# Altium PCB Universal_Driver v2.PcbDoc
Units mm, origin at the board's own origin, x right, y up, seen from the top; angles counter-clockwise.
Board outline 46.4 x 57.12 mm, 4 copper layers (Top Layer, Layer 2, Layer 3, Bottom Layer), stack 1.369 mm thick; 42 components, 44 nets, 192 pads, 31 vias.
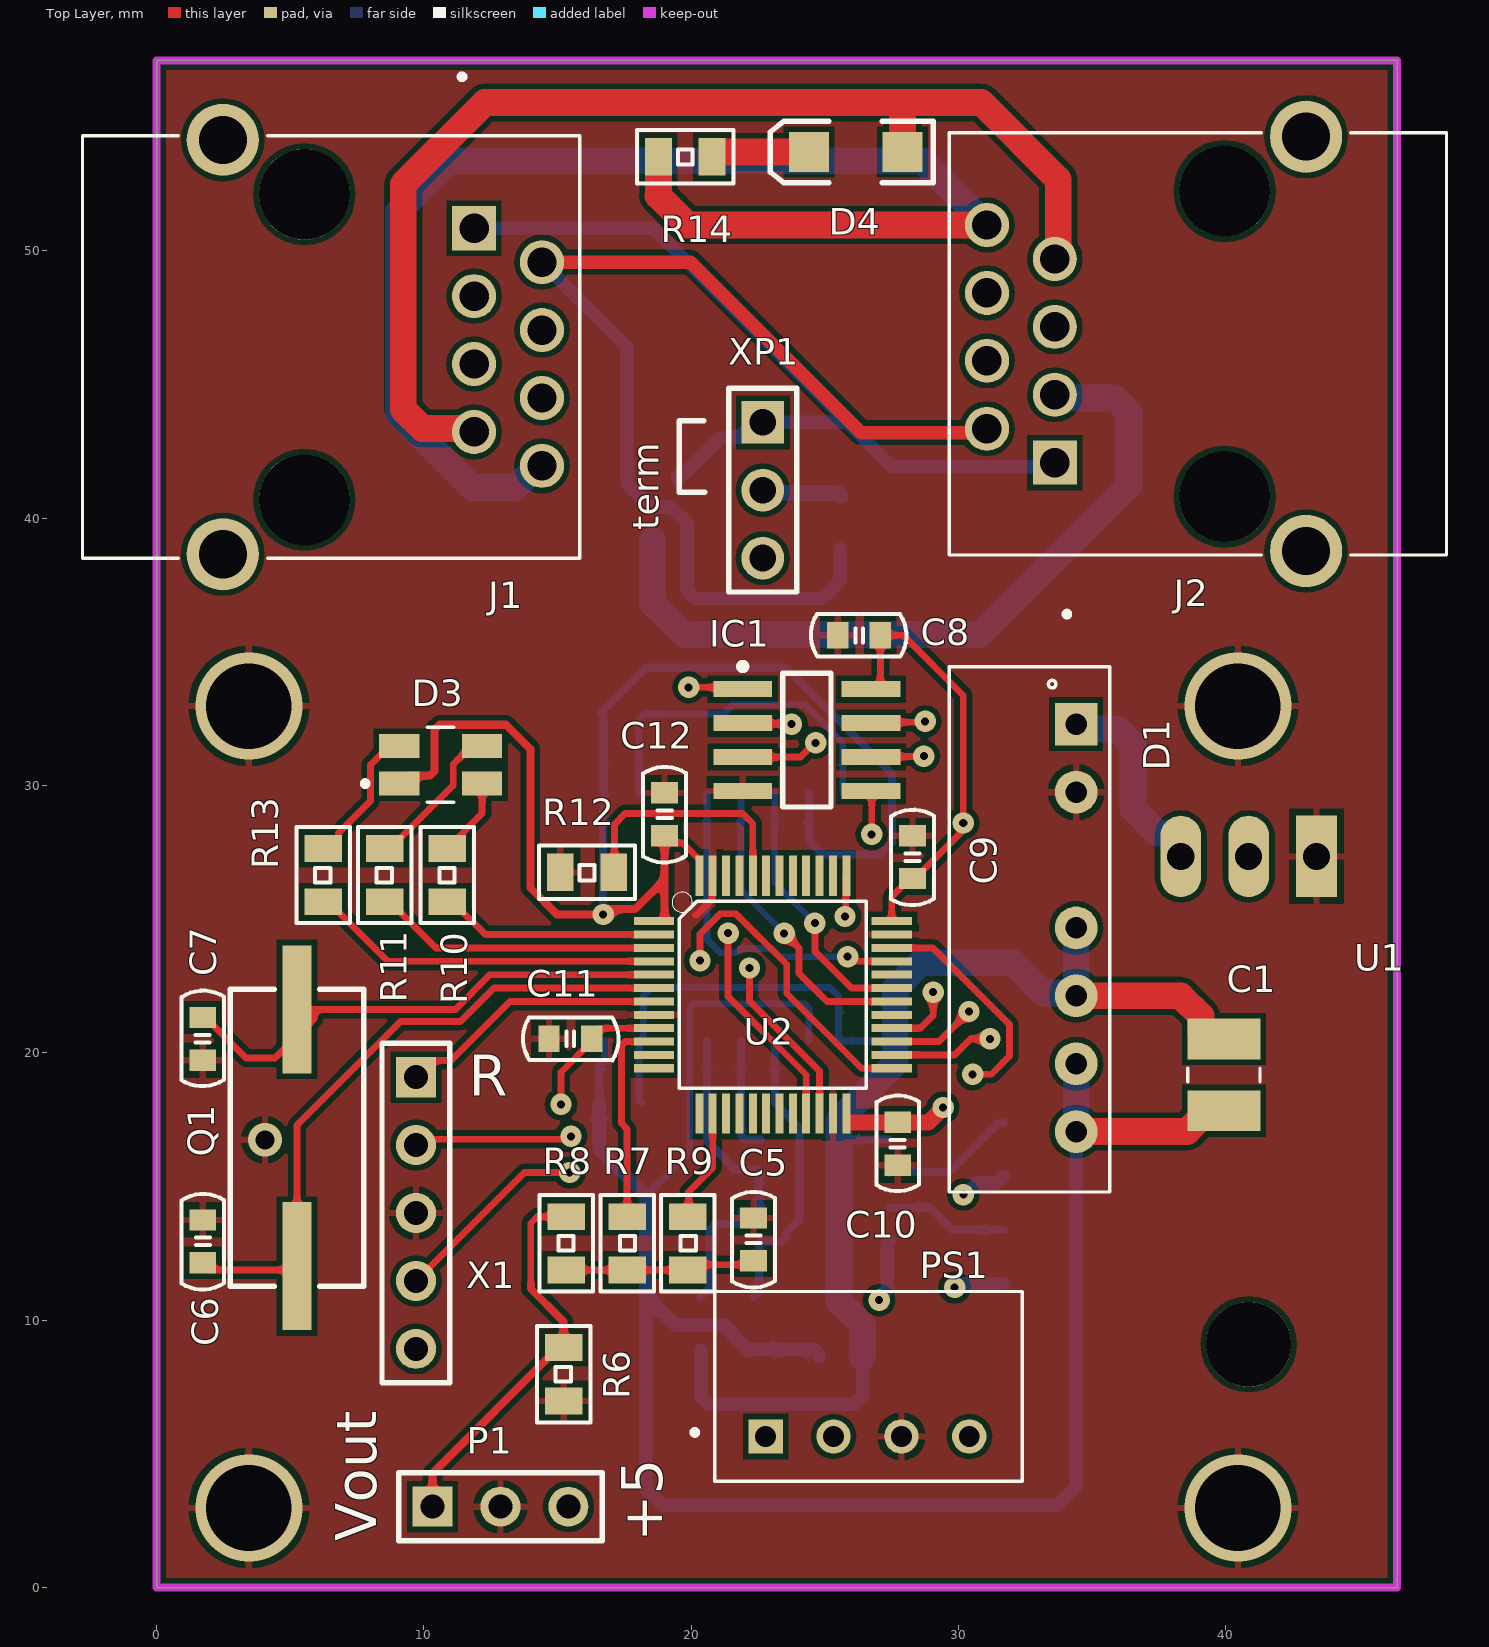
[diagram p0: Top Layer view]
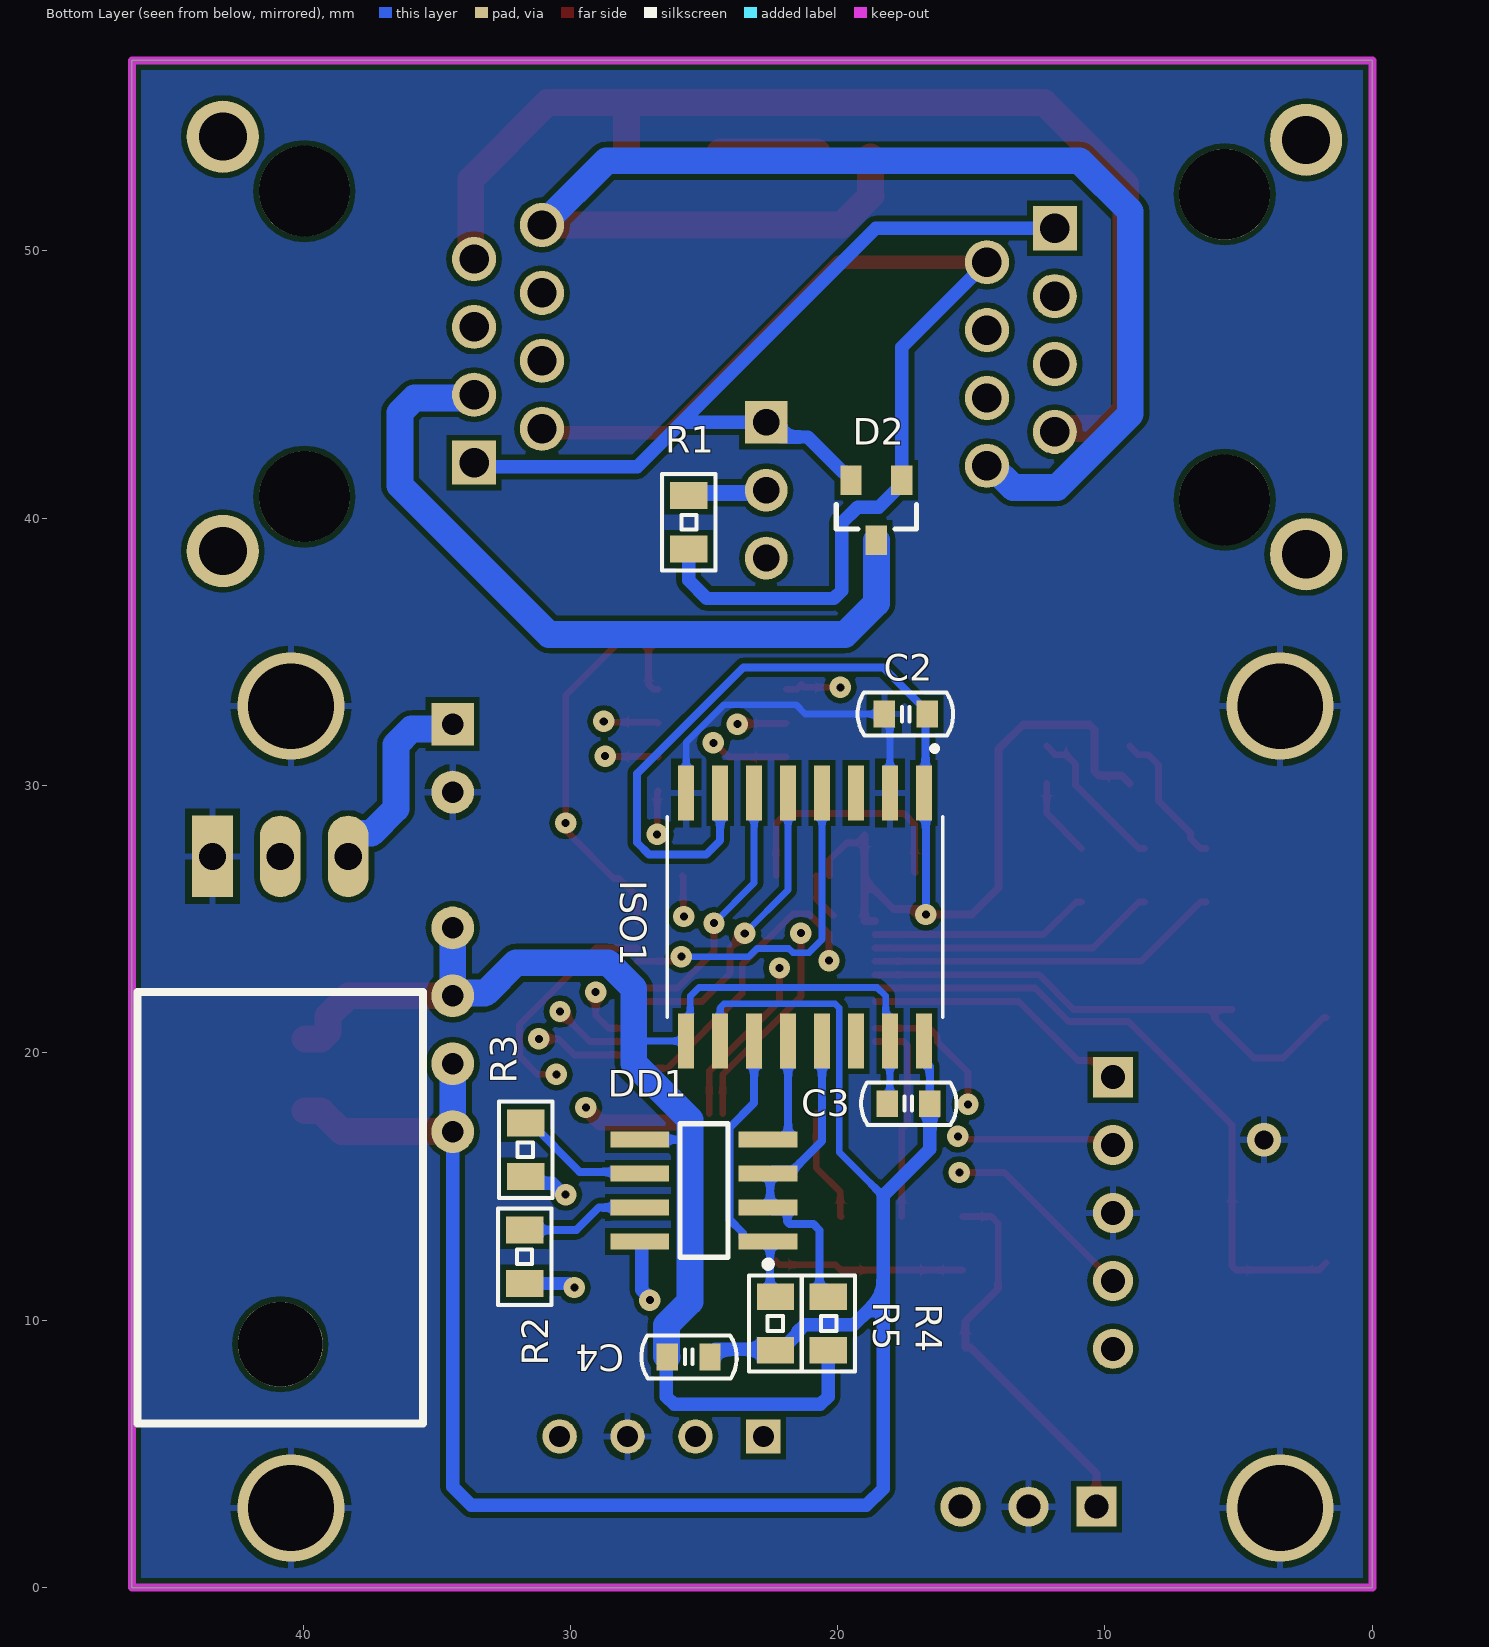
[diagram p1: Bottom Layer view, seen from below]
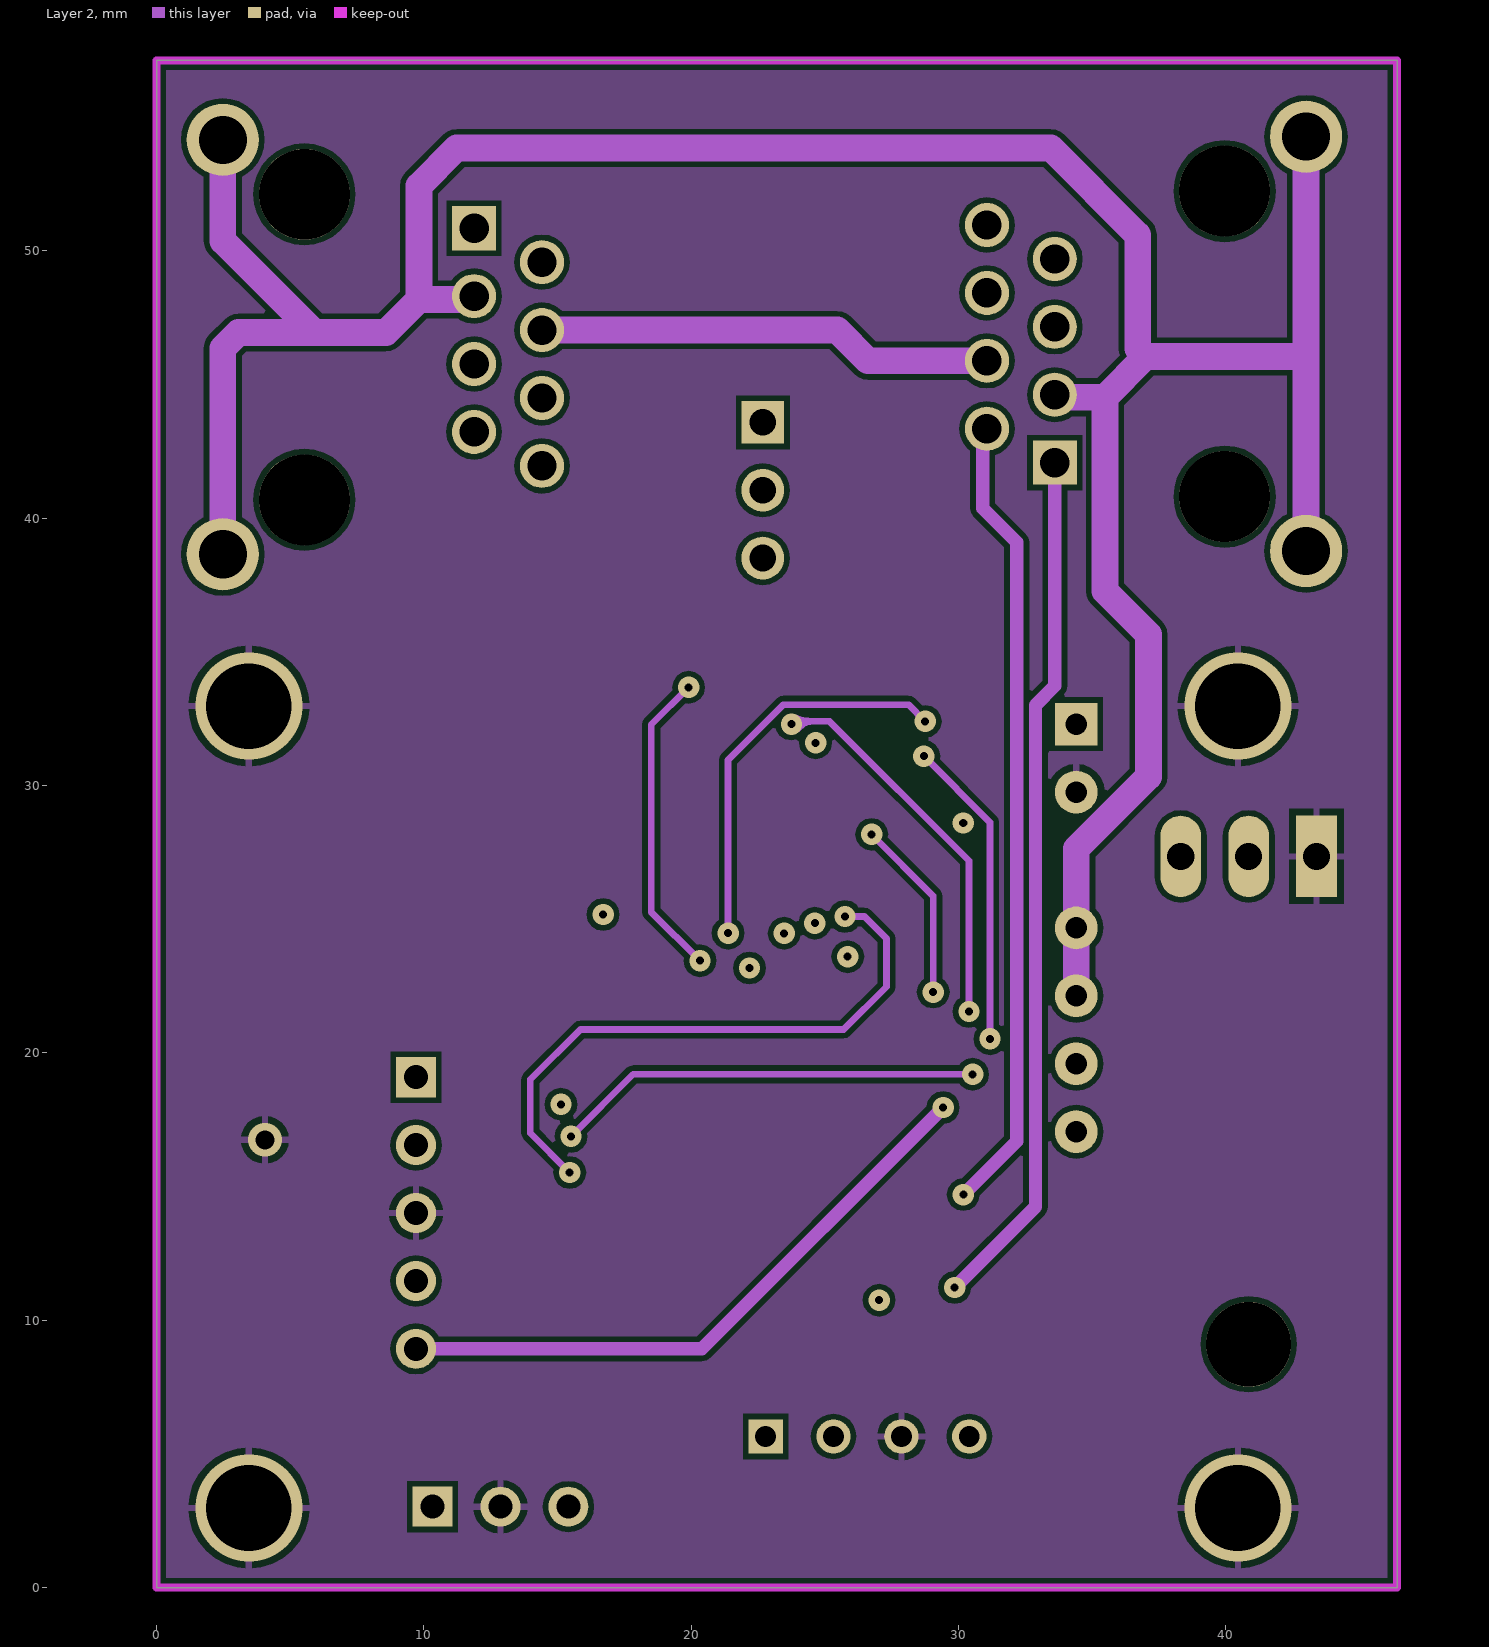
[diagram p2: Layer 2]
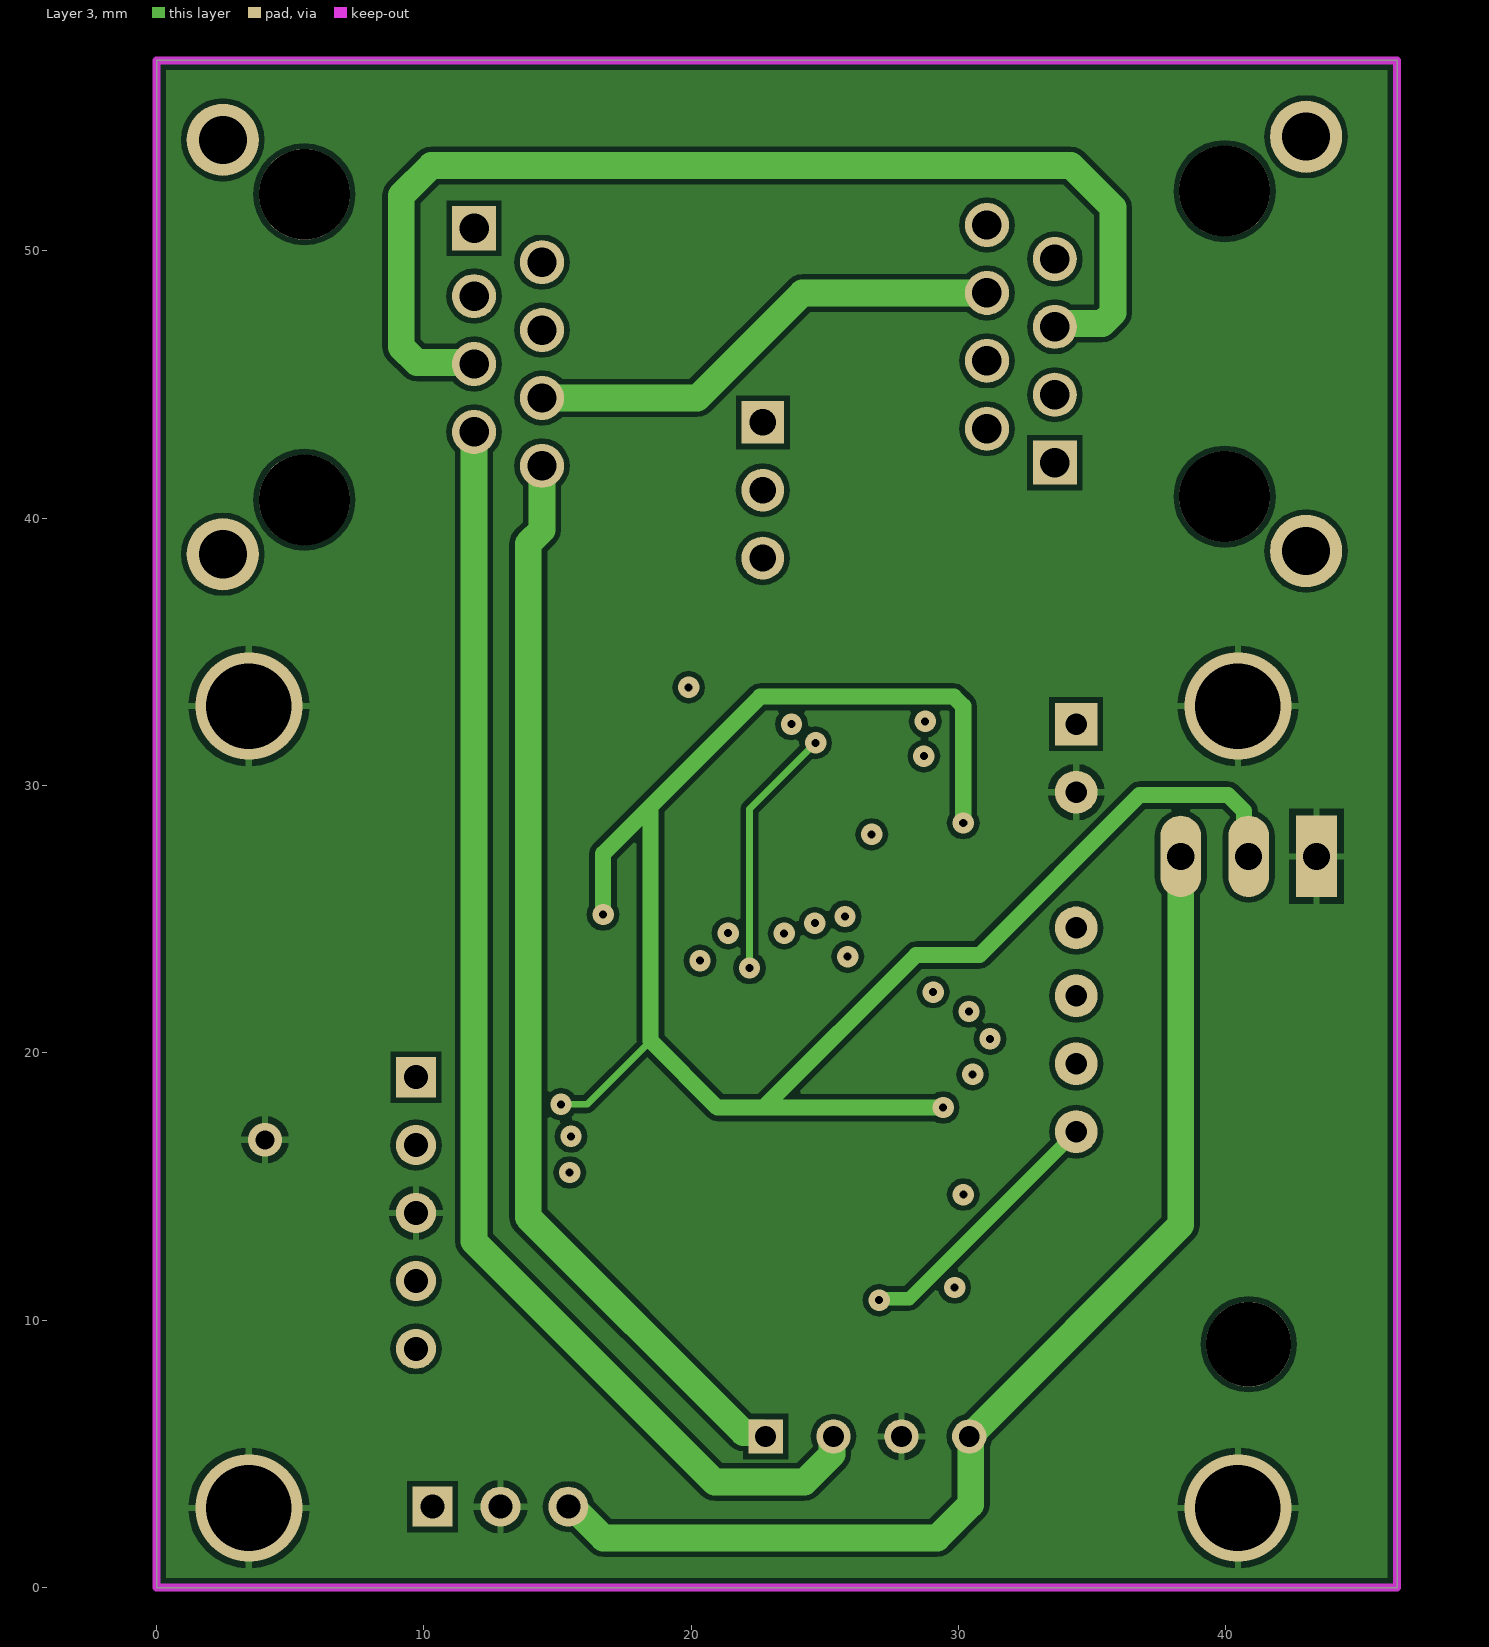
[diagram p3: Layer 3]

## Layer stack, top to bottom
Top Solder: solder mask 0.0254, SM-001, Dk 4
Top Layer: signal copper 0.035
Dielectric 1: prepreg 0.1295, PP-017, Dk 4.3
Dielectric 2: prepreg 0.1295, PP-017, Dk 4.3
Layer 2: signal copper 0.035
Dielectric 3: core 0.7112, Core-039, Dk 4.8
Layer 3: signal copper 0.035
Dielectric 4: prepreg 0.1295, PP-017, Dk 4.3
Dielectric 5: prepreg 0.1295, PP-017, Dk 4.3
Bottom Layer: signal copper 0.035
Bottom Solder: solder mask 0.0254, SM-001, Dk 4

## Board outline
0,0 0,57.125 46.4,57.125 46.4,0

## Design rules (kind name [scope] priority, off if disabled: settings)
Clearance Clearance_1 [InNetClass('ISO') vs InNet('GND')] p1: gap=1 ignorepadtopadclearanceinfootprint=FALSE
Clearance [All] p2: gap=0.2 ignorepadtopadclearanceinfootprint=FALSE
ComponentClearance [All] p1: gap=0.01 collisioncheckmode=3 verticalgap=0.01 showdistances=FALSE
DiffPairsRouting [All] p1: maxlimit=0.254 minlimit=0.2 mostfreqgap=0.254 toplayer_minwidth=0.25 toplayer_maxwidth=0.381 toplayer_prefwidth=0.381 midlayer1_minwidth=0.25 midlayer1_maxwidth=0.381 midlayer1_prefwidth=0.381 midlayer2_minwidth=0.25 midlayer2_maxwidth=0.381 midlayer2_prefwidth=0.381 bottomlayer_minwidth=0.25 bottomlayer_maxwidth=0.381 bottomlayer_prefwidth=0.381 maxuncoupledlength=12.7
HoleSize [All] p1: absolutevalues=TRUE maxlimit=5 minlimit=0.025 maxpercent=80.000 minpercent=20.000
MinimumSolderMaskSliver [All] p1: minsoldermaskwidth=0
PolygonConnect [All] p1: connectstyle=Relief reliefconductorwidth=0.254 reliefentries=4 polygonreliefangle="90 Angle" airgapwidth=0.254
RoutingVias [All] p1: holewidth=0.3 width=1 viastyle="Through Hole" minholewidth=0.3 minwidth=0 maxholewidth=1 maxwidth=4
SilkToSolderMaskClearance [IsPad] p1: minsilkscreentomaskgap=0.1 clearancetoexposedcopper=TRUE
SolderMaskExpansion [All] p1: expansion=0.102 istentingtop=FALSE
UnRoutedNet [All] p1: checkbadconnections=TRUE
Width [All] p1: maxlimit=4 minlimit=0.254 preferedwidth=0.254
24 further rules are at their usual default settings.

## Components (designator, comment, footprint, x,y, rotation, side; value= is the part's Value field where it differs from the comment)
C1 "10uF" CAPC3225X270N 39.925,19.175 r270 top
C2 "0.1uF" "CAPACITOR 0603" 16.65,32.675 r0 bottom
C3 "0.1uF" "CAPACITOR 0603" 18.15,18.1 r180 bottom
C4 "0.1uF" "CAPACITOR 0603" 26.375,8.625 r180 bottom
C5 "0.1uF" "CAPACITOR 0603" 22.325,13.825 r270 top
C6 "20pF" "CAPACITOR 0603" 1.725,13.75 r270 top
C7 "20pF" "CAPACITOR 0603" 1.725,19.725 r90 top
C8 "0.1uF" "CAPACITOR 0603" 27.075,35.625 r180 top
C9 "0.1uF" "CAPACITOR 0603" 28.275,28.125 r270 top
C10 "0.1uF" "CAPACITOR 0603" 27.725,15.8 r90 top
C11 "0.1uF" "CAPACITOR 0603" 14.675,20.525 r0 top
C12 "0.1uF" "CAPACITOR 0603" 19,29.725 r270 top
D1 "AM1DS-0505SJZ" AM2D-NZ 34.4,32.295 r270 top
D2 "SM712" SOT23 18.55,40.3 r270 bottom
D3 "150141M173100" LED_150141M173100 10.625,30.775 r180 top
D4 "LED2" 3.2X1.6X1.1 26.15,53.7 r180 top
DD1 "MAX485" NSO8 25,14.85 r0 bottom
IC1 "GD25Q16CTIGR" NSO8 24.325,31.7 r0 top
ISO1 "D?" *SOIC127P1030X265-16N 21.22,25.085 r270 bottom
J1 "A-2004-2-4-LPS-N-R" ASSMANN_A-2004-2-4-LPS-N-R 5.525,46.405 r270 top
J2 "A-2004-2-4-LPS-N-R" ASSMANN_A-2004-2-4-LPS-N-R 39.95,46.525 r90 top
P1 "Header 3" HDR1X3 10.32,3.025 r0 top
PS1 "TME_2405S" CONV_TME_2405S 26.63,7.525 r0 top
Q1 "12MHz" HC49SM 5.25,16.825 r90 top
R1 "120" "Resistor 0805" 25.575,40.85 r270 bottom
R2 "10" "Resistor 0805" 31.7,11.375 r90 bottom
R3 "10" "Resistor 0805" 31.675,15.375 r90 bottom
R4 "10K" "Resistor 0805" 20.35,10.875 r270 bottom
R5 "10K" "Resistor 0805" 22.325,8.875 r90 bottom
R6 "10K" "Resistor 0805" 15.225,6.975 r90 top
R7 "10" "Resistor 0805" 17.6,13.875 r270 top
R8 "10K" "Resistor 0805" 15.325,11.875 r90 top
R9 "10" "Resistor 0805" 19.875,13.875 r270 top
R10 "3.9k" "Resistor 0805" 10.875,25.65 r90 top
R11 "3.9k" "Resistor 0805" 8.525,25.65 r90 top
R12 "510" "Resistor 0805" 17.1,26.75 r180 top
R13 "3.9k" "Resistor 0805" 6.225,25.65 r90 top
R14 "10K" "Resistor 0805" 20.775,53.525 r180 top
U1 "LM1117T-3.3" TO-220-KCS0003B 40.85,27.35 r180 top
U2 "STM32F303CBT7" LQFP48 23.05,22.175 r0 top
X1 "PLS-5" PLS-5-3D 9.7,19.09 r270 top
XP1 "PLS-3" ZL201-3 22.675,41.05 r270 top

## Footprints (in the part's own frame and the unit in brackets; to place one, negate y for a bottom-side part, rotate by r counter-clockwise, add the part's x,y. Pads: shape width x height; smd on the part's side, far side on the other; paste and mask are expansions set on the pad)
3.2X1.6X1.1 [mm] "SMT LED; 2 Flat Leads"
  rect 1.5x1.5 smd: 1(-1.75,0) 2(1.75,0)
  silkscreen extent -2.9,-1.15 3.2,1.15
*SOIC127P1030X265-16N [mm]
  rect 2.06x0.6 smd: 1(-4.64,4.445) 2(-4.64,3.175) 3(-4.64,1.905) 4(-4.64,0.635) 5(-4.64,-0.635) 6(-4.64,-1.905) 7(-4.64,-3.175) 8(-4.64,-4.445) 9(4.64,-4.445) 10(4.64,-3.175) 11(4.64,-1.905) 12(4.64,-0.635) 13(4.64,0.635) 14(4.64,1.905) 15(4.64,3.175) 16(4.64,4.445)
  silkscreen extent -6.4,-5.15 3.75,5.15
AM2D-NZ [mm]
  rect 1.6x1.6 hole 0.8: 1(0,0)
  round 1.6 hole 0.8: 2(2.54,0) 4(7.62,0) 5(10.16,0) 6(12.7,0) 7(15.24,0)
  silkscreen extent -2.15,-4.75 17.5,1.25
ASSMANN_A-2004-2-4-LPS-N-R [mm]
  rect 1.65x1.65 hole 1.1: 1(-4.445,6.35)
  round 1.65 hole 1.1: 2(-3.175,8.89) 3(-1.905,6.35) 4(-0.635,8.89) 5(0.635,6.35) 6(1.905,8.89) 7(3.175,6.35) 8(4.445,8.89)
  round 2.7 hole 1.8: S1(-7.75,-3.05) S2(7.75,-3.05)
  round 3.4 hole 3.4 unplated: ""(-5.715,0) ""(5.715,0)
  silkscreen extent -10.21,-8.3 7.9,10.3
"CAPACITOR 0603" [mm]
  rect 0.8x1 smd: 1(0,0) 2(1.6,0)
  silkscreen extent -0.97,-0.8 2.6,0.8, body extent -0.01,-0.38 1.64,0.42, height 0.81
CAPC3225X270N [mm]
  rect 1.53x2.72 smd: 1(-1.341,0) 2(1.341,0)
  silkscreen extent -0.26,-1.35 0.26,1.35
CONV_TME_2405S [mm]
  rect 1.288x1.288 hole 0.78: 1(-3.85,-1.875)
  round 1.288 hole 0.78: 2(-1.31,-1.875) 3(1.23,-1.875) 4(3.77,-1.875)
  silkscreen extent -6.6,-3.55 5.75,3.55, body extent -5.83,-3.51 5.57,2.49, height 10
HC49SM [mm] "Quartz crystal resonator"
  rect 4.8x1.1 smd mask+0.06: 1(-4.8,0) 2(4.8,0)
  silkscreen extent -5.55,-2.5 5.55,2.5, body extent -6.7,-2.45 6.7,2.45, height 5.09
HDR1X3 [mm] "Connector; Header; 3 Position"
  rect 1.5x1.5 hole 0.9: 1(0,0)
  round 1.5 hole 0.9: 2(2.54,0) 3(5.08,0)
  silkscreen extent -1.27,-1.27 6.35,1.27
LED_150141M173100 [mm]
  rect 1.5x0.9 smd: 1(1.55,0.7) 2(1.55,-0.7) 3(-1.55,0.7) 4(-1.55,-0.7)
  silkscreen extent -0.5,-1.4 2.92,1.4
LQFP48 [mm]
  rect 1.5x0.3 smd: 1(-4.45,2.75) 2(-4.45,2.25) 3(-4.45,1.75) 4(-4.45,1.25) 5(-4.45,0.75) 6(-4.45,0.25) 7(-4.45,-0.25) 8(-4.45,-0.75) 9(-4.45,-1.25) 10(-4.45,-1.75) 11(-4.45,-2.25) 12(-4.45,-2.75) 25(4.45,-2.75) 26(4.45,-2.25) 27(4.45,-1.75) 28(4.45,-1.25) 29(4.45,-0.75) 30(4.45,-0.25) 31(4.45,0.25) 32(4.45,0.75) 33(4.45,1.25) 34(4.45,1.75) 35(4.45,2.25) 36(4.45,2.75)
  rect 0.3x1.5 smd: 13(-2.75,-4.45) 14(-2.25,-4.45) 15(-1.75,-4.45) 16(-1.25,-4.45) 17(-0.75,-4.45) 18(-0.25,-4.45) 19(0.25,-4.45) 20(0.75,-4.45) 21(1.25,-4.45) 22(1.75,-4.45) 23(2.25,-4.45) 24(2.75,-4.45) 37(2.75,4.45) 38(2.25,4.45) 39(1.75,4.45) 40(1.25,4.45) 41(0.75,4.45) 42(0.25,4.45) 43(-0.25,4.45) 44(-0.75,4.45) 45(-1.25,4.45) 46(-1.75,4.45) 47(-2.25,4.45) 48(-2.75,4.45)
  silkscreen extent -3.77,-3.5 3.5,3.84
NSO8 [mm] "SOIC, 8-Leads, Body 4.9x3.9mm, Pitch 1.27mm"
  rect 2.2x0.6 smd mask+0.06: 1(-2.4,1.905) 2(-2.4,0.635) 3(-2.4,-0.635) 4(-2.4,-1.905) 5(2.4,-1.905) 6(2.4,-0.635) 7(2.4,0.635) 8(2.4,1.905)
  silkscreen extent -2.52,-2.5 0.9,2.88, body extent -3,-2.45 3,2.45, height 1.7
PLS-5-3D [mm] "Connector; Header; 5 Position"
  rect 1.5x1.5 hole 0.9: 1(0,0)
  round 1.5 hole 0.9: 2(2.54,0) 3(5.08,0) 4(7.62,0) 5(10.16,0)
  silkscreen extent -1.27,-1.27 11.43,1.27, body extent -1.27,-1.27 11.43,1.27, height 8.44
"Resistor 0805" [mm]
  rect 1x1.4 smd: 1(0,0) 2(2,0)
  silkscreen extent -0.8,-1 2.8,1, body extent -0.03,-0.65 2.02,0.65, height 0.41
SOT23 [mm] "SOT23, 3-Leads, Body 2.9x1.3mm, Pitch 0.95mm"
  rect 1.1x0.8 smd mask+0.06: 1(-1.125,0.95) 2(-1.125,-0.95) 3(1.125,0)
  silkscreen extent -0.2,-1.5 0.7,1.5, body extent -1.32,-1.5 1.32,1.5, height 1.08
TO-220-KCS0003B [mil]
  rect 60x120 hole 40: 1(-100,0)
  oval 60x120 hole 40: 2(0,0) 3(100,0)
  round 125 hole 125 unplated: ""(0,718.5)
  body extent -190,-97 200,827
ZL201-3 [mm] "Connector; PLS-3; pitch 2.54"
  rect 1.6x1.6 hole 1 mask+0.06: 1(-2.54,0)
  round 1.6 hole 1 mask+0.06: 2(0,0) 3(2.54,0)
  silkscreen extent -3.81,-1.27 3.81,1.27, body extent -3.81,-1.27 3.81,1.27, height 8.44

## Part data
C1 C2 C3 C4 C5 C6 C7 C8 C9 C10 C11 C12: library part Capasitor
D2: "Asymmetrical TVS Diode for Extended Common-Mode RS-485"
D3: "Red, Green, Blue _RGB_ 625nm Red, 520nm Green, 470nm Blue LED Indication - Discrete 2V Red, 3.2V Green, 3.2V Blue 1411 _3528 Metric_", Package="1411 WÃ¼rth Elektronik", Availability=Unavailable, MF="Wurth Electronics", MP=150141M173100, Price=None, SnapEDA_Link=https://www.snapeda.com/parts/150141M173100/Wurth%20Electronics%20Inc./view-part/281733/?ref=snap
D4: "Typical RED, GREEN, YELLOW, AMBER GaAs LED", LatestRevisionDate=17-Jul-2002, LatestRevisionNote="Re-released for DXP Platform.", PackageDescription="SM LED; 2 Flat Leads", PackageReference=3.2X1.6X1.1, PackageVersion=Feb-2002, Published=8-Jun-2000, Publisher="Altium Limited"
DD1: "Low-Power, Slew-Rate-Limited RS-485/RS-422 Transceiver", ComponentLink1URL=http://pdfserv.maxim-ic.com/en/ds/MAX1487-MAX491.pdf, Type=MAX485
IC1: library part W25Q128FVEIG, "128M-bit Serial Flash Memory with uniform 4KB sectors and Dual/Quad SPI and QPI"
ISO1: library part ISO7341
J1 J2: "Jack Modular Connector 8p8c _RJ45, Ethernet_ 90Â° Angle _Right_ Shielded", Package=None, Availability=Unavailable, MF="Assmann WSW", MP=A-2004-2-4-LPS-N-R, Price=None, SnapEDA_Link=https://www.snapeda.com/parts/A-2004-2-4-LPS-N-R/Assmann%20WSW%20Components/view-part/454861/?ref=snap
P1: "Header, 3-Pin", LatestRevisionDate=17-Jul-2002, LatestRevisionNote="Re-released for DXP Platform.", Publisher="Altium Limited"
PS1: "1 Watt DC/DC converter, industrial, 10% input, unregulated, encapsulated, SIP-4 package", Package="SIP-4 Traco Power", Availability="In Stock", Check_prices=https://www.snapeda.com/parts/TME%202405S/Traco%20Power/view-part/488335/?ref=eda, MF="Traco Power", MP="TME 2405S", Price=None, SnapEDA_Link=https://www.snapeda.com/parts/TME%202405S/Traco%20Power/view-part/488335/?ref=snap
Q1: library part "Quartz Crystal", "Quartz Crystal"
R1 R2 R3 R4 R5 R6 R7 R8 R9 R10 R11 R12 R13 R14: library part Resistor
U1: "Linear Voltage Regulator IC 1 Output 800mA TO-220-3", Package="TO-220 Texas Instruments", Availability=Unavailable, MF="Texas Instruments", MP=LM1117T-3.3, Price=None, SnapEDA_Link=https://www.snapeda.com/parts/LM1117T-3.3/Texas%20Instruments/view-part/103788/?ref=snap
U2: "ARMÂ® CortexÂ®-M4 STM32F3 Microcontroller IC 32-Bit 72MHz 128KB _128K x 8_ FLASH 48-LQFP _7x7_", Package="LQFP-48 STMicroelectronics", Availability=Unavailable, MF=STMicroelectronics, MP=STM32F303CBT7, Price=None, SnapEDA_Link=https://www.snapeda.com/parts/STM32F303CBT7/STMicroelectronics/view-part/560080/?ref=snap
X1: "Header, 5-Pin", LatestRevisionDate=17-Jul-2002, LatestRevisionNote="Re-released for DXP Platform.", Publisher="Altium Limited"
XP1: library part "Select jump", "Connector, 3-Pin", Class="Электронные компоненты", Installation=DIP, Ordering_Information={Ordering_Information}, Pins=3, Pitch_mm={Pitch_mm}, SubClass=Разъемы, Type_of_connector={Type_of_connector}

## Via types
v1: diameter 0.8, hole 0.3, Top Layer to Bottom Layer, tented both sides, 26 vias
v2: diameter 4, hole 3.2, Top Layer to Bottom Layer, 4 vias
v3: diameter 1.27, hole 0.711, Top Layer to Bottom Layer, tented both sides, 1 vias

## Nets (pads, with @x,y where several pads share a name; then routed paths per layer and width w, separated by ;. In a path a pad name is that pad's centre, name@x,y a point inside that pad or via, vN(x,y) a via of type N, cw(c..) or ccw(c..) an arc to the next point about the centre after c; other vN are vias at no path point)
485_A: D2.1 J1.2 J2.2 R1.2 R3.1 | length 73.5
  Top Layer w0.5: J1.2 19.97,49.58 26.35,43.2 30.91,43.2 J2.2
  Layer 2 w0.5: v1(30.175,14.7) 32.175,16.7 32.175,39.1 30.9,40.375 30.9,43.19 J2.2
  Bottom Layer w0.5: J1.2 17.6,46.395 D2.1 17.6,41.275 18.457,40.418 19.257,40.418 19.85,39.825 19.85,37.293 20.143,37 24.9,37 25.575,37.675 R1.2 ; v1(30.175,14.7) 30.256,14.7 30.681,15.125 31.425,15.125 R3.1
485_B: D2.2 J1.1 J2.1 R2.1 XP1.1 | length 67.1
  Layer 2 w0.5: v1(29.85,11.225) 32.875,14.25 32.875,33.006 33.6,33.731 J2.1
  Bottom Layer w0.5: J1.1 13.694,50.85 13.699,50.855 18.57,50.855 25.835,43.59 ; D2.2 19.5,41.575 19.65,41.725 19.8,41.725 21.115,43.04 22.125,43.04 XP1.1 25.835,43.59 ; v1(29.85,11.225) 29.931,11.225 30.081,11.375 R2.1 ; J2.1 33.445,41.925 27.5,41.925 25.835,43.59
+3.3v: C2.1 C8.1 C9.2 C10.2 C11.2 C12.2 D3.1 IC1.8 ISO1.1 ISO1.7 U1.2 U2.1 U2.9 U2.24 U2.36 U2.48 X1.5 | length 174
  Top Layer w0.254: v1(15.125,18.075) 15.125,19.275 16.275,20.425 C11.2 ; C11.2@16.275,20.625 16.575,20.925 U2.9 ; C12.2 19.273,27.852 19.673,27.852 20.3,27.225 U2.48 ; IC1.8 26.902,33.605 27.075,33.778 C8.1 27.925,35.625 30.173,33.377 v1(30.173,28.598) 30.069,28.494 30.069,28.219 28.375,26.525 C9.2 28.175,26.525 27.5,25.85 U2.36
  Top Layer w0.3: D3.1 9.375,30.375 10.224,30.375 10.4,30.551 10.4,32.099 10.576,32.275 13.07,32.275 13.977,31.368 13.977,26.178 14.98,25.175 16.835,25.175 17.035,25.375 17.9,25.375 19,26.475 ; U2.1 19,24.925 19,26.475 ; C12.2 19,26.475
  Top Layer w0.6: 25.95,17.4 C10.2 28.875,17.4 29.42,17.945 v1(29.42,17.955)
  Layer 2 w0.5: X1.5 20.394,8.93 v1(29.42,17.955)
  Layer 3 w0.254: v1(15.125,18.075) 16.1,18.075 18.475,20.45
  Layer 3 w0.6: v1(16.7,25.175) 16.7,27.45 18.475,29.225 ; v1(29.42,17.955) 29.414,17.95 22.7,17.95 ; v1(30.173,28.598) 30.173,32.974 29.822,33.325 22.575,33.325 18.475,29.225 ; U1.2 40.673,27.527 40.673,29.052 40.075,29.65 36.775,29.65 30.787,23.662 28.412,23.662 22.7,17.95 ; 18.475,29.225 18.475,20.45 20.975,17.95 22.7,17.95
  Bottom Layer w0.3: v1(16.7,25.175) 16.7,29.1 16.775,29.175 ISO1.1 16.713,29.787 16.713,32.613 C2.1 16.65,32.775 18.3,34.425 23.528,34.425 27.5,30.453 27.5,27.864 27.061,27.425 24.918,27.425 24.395,27.948 ISO1.7
+5v: D1.1 P1.3 PS1.4 U1.3 | length 51.3
  Layer 3 w1: P1.3 15.535,3.025 16.71,1.85 29.2,1.85 30.45,3.1 30.45,5.6 PS1.4 38.31,13.56 U1.3
  Bottom Layer w1: D1.1 34.582,32.113 35.939,32.113 36.525,31.527 36.525,29.135 37.448,28.212 38.068,28.212 38.31,27.97 U1.3
+5v_ISO: C1.2 C3.2 C4.2 D1.6 D1.7 DD1.8 ISO1.10 ISO1.16 R5.1 | length 89.3
  Top Layer w1: D1.7 38.551,17.055 39.33,17.834 C1.2
  Layer 3 w0.5: v1(27.025,10.75) 27.082,10.807 28.152,10.807 D1.7
  Bottom Layer w0.254: 18.3,14.65 19.942,16.292 19.942,21.689 20.091,21.838 24.246,21.838 24.395,21.689 ISO1.10
  Bottom Layer w0.3: C3.2 16.55,19.49 16.775,19.715 ISO1.16
  Bottom Layer w0.5: C3.2 16.55,16.4 18.3,14.65 18.3,10.925 ; C4.2 24.775,8.725 24.588,8.913 22.363,8.913 R5.1 22.125,8.875 21.521,9.479 21.521,9.54 21.236,9.825 19.4,9.825 18.3,10.925 ; v1(27.025,10.75) 27.025,10.831 27.325,11.131 27.325,12.895 27.35,12.895 DD1.8 ; D1.7 34.4,3.775 33.7,3.075 18.925,3.075 18.3,3.7 18.3,10.925
  Bottom Layer w1: D1.7 D1.6
+5v_RJ: J1.4 J2.4 | length 17.1
  Layer 2 w1: J1.4 25.46,47.04 26.61,45.89 J2.4
+24: D4.1 J1.7 J2.7 PS1.2 | length 91.8
  Top Layer w1: J1.7 11.751,43.354 9.946,43.354 9.225,44.075 9.225,52.5 12.275,55.55 27.875,55.55 ; D4.1 27.9,55.525 27.875,55.55 ; J2.7 33.724,49.824 33.724,52.676 30.85,55.55 27.875,55.55
  Layer 3 w1: J1.7 11.875,12.95 20.875,3.95 24.234,3.95 25.265,4.981 25.265,5.595 PS1.2
AGND: C2.2 C5.1 C6.1 C7.1 C8.2 C9.1 C10.1 C11.1 C12.1 D1.2 IC1.4 ISO1.2 ISO1.8 P1.2 PS1.3 R6.1 R12.2 U1.1 U2.8 U2.23 U2.35 U2.47 X1.3 | length 14.8
  Top Layer w0.254: 20.15,25.15 20.187,25.15 20.777,25.74 20.777,26.602 U2.47
  Bottom Layer w0.254: ISO1.2 18.045,32.47 C2.2 21.211,32.675 21.563,33.027 24.251,33.027 25.665,31.613 ISO1.8
  other v2: 3.45,2.975 40.45,2.975 3.45,32.975 40.45,32.975
  other v3: 4.05,16.75
B: R13.1 U2.4 | length 13.3
  Top Layer w0.254: R13.1 6.425,25.65 8.65,23.425 U2.4
DE: ISO1.4 U2.33 | length 12.9
  Top Layer w0.254: v1(25.85,23.6) 25.998,23.6 26.173,23.425 U2.33
  Bottom Layer w0.254: ISO1.4 20.585,24.239 21.075,23.749 21.677,23.749 21.832,23.904 23.018,23.904 23.322,23.6 v1(25.85,23.6)
G: R11.1 U2.3 | length 10.8
  Top Layer w0.254: R11.1 8.725,25.65 9.098,25.277 10.45,23.925 U2.3
GND_24: J1.8 J2.8 PS1.1 R14.2 | length 93
  Top Layer w1: R14.2 18.775,52.1 18.75,52.075 19.855,50.97 J2.8
  Layer 3 w1: J1.8 14.415,39.565 13.9,39.05 13.9,13.85 21.956,5.794 22.636,5.794 PS1.1
  Bottom Layer w1: J1.8 14.239,41.96 13.431,41.152 11.796,41.152 9.05,43.898 9.05,51.475 10.95,53.375 28.655,53.375 J2.8
GND_ISO: C1.1 C3.1 C4.1 D1.4 D1.5 D2.3 DD1.5 ISO1.9 ISO1.15 J1.3 J1.S1 J1.S2 J2.3 J2.S1 J2.S2 R4.2 | length 203
  Top Layer w1: D1.5 38.306,22.135 39.065,21.376 39.065,20.781 39.33,20.516 C1.1
  Layer 2 w1: J1.S2 2.475,46.364 3.061,46.95 5.9,46.95 ; J1.S1 2.475,50.375 5.9,46.95 ; J1.3 11.751,48.186 9.811,48.186 ; J2.3 33.695,44.525 35.475,44.525 ; D1.5 34.4,27.634 37.1,30.334 37.1,35.65 35.475,37.275 35.475,44.525 ; J2.S1 43,46.05 ; J2.S2 43,46.05 ; 5.9,46.95 8.575,46.95 9.811,48.186 ; 9.811,48.186 9.811,52.436 11.225,53.85 33.45,53.85 36.7,50.6 36.7,46.35 37,46.05 ; 35.475,44.525 37,46.05 ; 37,46.05 43,46.05
  Bottom Layer w0.254: C3.1 18.045,18.205 ISO1.15 18.2,20.6 18.2,22.126 18.52,22.447 25.19,22.447 25.51,22.126 25.51,20.6 ISO1.9 27.555,20.445 27.625,20.375
  Bottom Layer w0.3: 25.525,16.7 25.58,16.755 DD1.5 ; 33.161,21.886 34.151,21.886 D1.5
  Bottom Layer w0.5: R4.2 20.357,8.868 20.357,7.143 20.65,6.85 26.117,6.85 26.41,7.143 C4.1@26.41,8.59 ; C4.1 C4.1@26.65,8.625
  Bottom Layer w1: D2.3 18.55,36.825 19.725,35.65 30.8,35.65 36.375,41.225 36.375,43.95 35.829,44.496 33.724,44.496 J2.3 ; C4.1 26.403,8.653 26.403,9.816 25.525,10.694 25.525,16.7 25.525,17.5 27.625,19.6 27.625,20.375 27.625,22.406 28.594,23.375 32.036,23.375 33.161,22.25 34.285,22.25 D1.5 D1.4
NetC5_2: C5.2 R7.2 R8.1 R9.2 | length 7.1
  Top Layer w0.254: R8.1 17.75,11.875 R9.2 20.075,12.075 22.175,12.075 C5.2
NetC6_2: C6.2 Q1.1 U2.6 | length 24.4
  Top Layer w0.254: C6.2 1.998,11.877 5.102,11.877 Q1.1 5.25,17.3 9.121,21.171 11.363,21.171 12.617,22.425 U2.6
NetC7_2: C7.2 Q1.2 U2.5 | length 19.6
  Top Layer w0.254: C7.2 1.825,21.325 3.341,19.809 4.431,19.809 5.888,21.266 5.888,21.625 ; Q1.2 5.888,21.625 ; U2.5 12.475,22.925 11.175,21.625 5.888,21.625
NetD3_2: D3.2 R13.2 | length 5.3
  Top Layer w0.254: R13.2 6.425,27.65 6.798,28.023 6.798,28.223 7.998,29.423 7.998,30.773 8.377,31.152 8.752,31.152 D3.2
NetD3_3: D3.3 R10.2 | length 3
  Top Layer w0.254: R10.2 12.175,28.95 D3.3
NetD3_4: D3.4 R11.2 | length 5.7
  Top Layer w0.254: R11.2 8.725,27.65 11.098,30.023 11.098,30.801 11.449,31.152 11.852,31.152 D3.4
NetD4_2: D4.2 R14.1 | length 3.8
  Top Layer w1: R14.1 20.775,53.7 D4.2
NetDD1_1: DD1.1 ISO1.11 R5.2 | length 11.1
  Bottom Layer w0.3: R5.2 22.525,11.075 22.525,12.795 22.6,12.87 DD1.1 23.4,12.945 23.55,13.095 23.55,13.27 24.05,13.77 24.05,17.2 23.125,18.125 ISO1.11
NetDD1_2: DD1.2 DD1.3 ISO1.13 R4.1 | length 12.7
  Bottom Layer w0.3: R4.1 20.678,11.203 20.678,13.365 20.908,13.595 21.808,13.595 21.878,13.665 21.878,14.065 22.45,14.065 DD1.2 22.6,14.29 22.525,14.365 22.525,15.335 22.6,15.41 DD1.3 22.45,15.635 21.65,15.635 20.585,16.7 ISO1.13
NetDD1_4: DD1.4 ISO1.12 | length 4.3
  Bottom Layer w0.3: ISO1.12 21.855,16.905 22.005,16.755 DD1.4
NetDD1_6: DD1.6 R3.2 | length 5.1
  Bottom Layer w0.3: DD1.6 27.463,15.548 29.648,15.548 31.475,17.375 R3.2
NetDD1_7: DD1.7 R2.2 | length 4.6
  Bottom Layer w0.3: DD1.7 28.937,14.215 29.777,13.375 R2.2
NetIC1_1: IC1.1 U2.25 | length 25.2
  Top Layer w0.254: v1(19.9,33.675) 21.245,33.675 21.348,33.778 21.521,33.605 IC1.1 ; v1(20.325,23.45) 20.325,24.453 21.075,25.203 21.677,25.203 23.571,23.309 23.571,22.223 26.369,19.425 U2.25
  Layer 2 w0.254: v1(19.9,33.675) 18.5,32.275 18.5,25.275 v1(20.325,23.45)
NetIC1_2: IC1.2 U2.27 | length 19.7
  Top Layer w0.254: IC1.2 21.943,32.317 23.733,32.317 v1(23.75,32.3) ; U2.27 29.263,20.425 v1(30.388,21.55)
  Layer 2 w0.254: v1(23.75,32.3) 23.854,32.404 25.171,32.404 30.388,27.187 v1(30.388,21.55)
NetIC1_3: IC1.3 U2.22 | length 18.9
  Top Layer w0.254: IC1.3 24.081,31.065 24.616,31.6 v1(24.65,31.6) ; v1(22.176,23.177) 22.176,21.949 24.8,19.325 U2.22
  Layer 3 w0.254: v1(22.176,23.177) 22.176,29.126 v1(24.65,31.6)
NetIC1_5: IC1.5 U2.28 | length 11.1
  Top Layer w0.254: IC1.5 26.75,29.77 v1(26.75,28.175) ; U2.28 28.58,20.925 29.05,21.395 v1(29.05,22.275)
  Layer 2 w0.254: v1(26.75,28.175) 29.05,25.875 v1(29.05,22.275)
NetIC1_6: IC1.6 U2.26 | length 17.5
  Top Layer w0.254: IC1.6 26.743,31.083 28.683,31.083 v1(28.7,31.1) ; U2.26 29.85,19.925 30.45,20.525 v1(31.175,20.525)
  Layer 2 w0.254: v1(28.7,31.1) 31.175,28.625 v1(31.175,20.525)
NetIC1_7: IC1.7 U2.21 | length 25
  Top Layer w0.254: v1(21.376,24.476) 21.376,22.107 24.3,19.183 U2.21 ; IC1.7 26.758,32.367 28.717,32.367 v1(28.75,32.4)
  Layer 2 w0.254: v1(21.376,24.476) 21.376,30.954 23.449,33.027 28.123,33.027 v1(28.75,32.4)
NetISO1_5: ISO1.5 U2.30 | length 11.6
  Top Layer w0.254: v1(23.475,24.475) 24.025,23.925 24.025,22.975 25.075,21.925 U2.30
  Bottom Layer w0.254: ISO1.5 21.855,26.095 v1(23.475,24.475)
NetISO1_6: ISO1.6 U2.31 | length 10
  Top Layer w0.254: v1(24.625,24.85) 24.625,23.797 25.997,22.425 U2.31
  Bottom Layer w0.254: ISO1.6 23.125,26.35 v1(24.625,24.85)
NetJ1_5: J1.5 J2.5 | length 42.7
  Layer 3 w1: J1.5 11.82,45.825 9.736,45.825 9.15,46.411 9.15,52.075 10.275,53.2 34.2,53.2 35.775,51.625 35.775,47.686 35.374,47.284 33.724,47.284 J2.5
NetJ1_6: J1.6 J2.6 | length 18.3
  Layer 3 w1: J1.6 20.225,44.5 24.155,48.43 J2.6
NetP1_1: P1.1 R6.2 R8.2 | length 14.7
  Top Layer w0.254: 13.995,11.375 13.995,13.626 14.244,13.875 R8.2
  Top Layer w0.3: P1.1 10.32,4.27 15.025,8.975 R6.2 15.225,9.95 13.995,11.18 13.995,11.375
NetR1_1: R1.1 XP1.2 | length 3
  Bottom Layer w0.6: XP1.2 22.775,40.95 25.475,40.95 R1.1
NetR7_1: R7.1 U2.10 | length 7.8
  Top Layer w0.254: R7.1 17.6,17.154 17.384,17.37 17.384,20.276 17.533,20.425 U2.10
NetR9_1: R9.1 U2.14 | length 4.2
  Top Layer w0.254: R9.1 19.9,13.9 19.9,14.8 20.8,15.7 U2.14
NetR12_1: R12.1 U2.44 | length 9.3
  Top Layer w0.254: R12.1 17.125,26.775 17.125,28.55 17.525,28.95 21.925,28.95 22.3,28.575 U2.44
NetU2_34: U2.34 X1.2 | length 30.4
  Top Layer w0.254: X1.2 9.921,16.771 15.396,16.771 v1(15.5,16.875) ; U2.34 29.041,23.925 31.902,21.064 31.902,19.877 31.225,19.2 v1(30.525,19.2)
  Layer 2 w0.254: v1(15.5,16.875) 17.825,19.2 v1(30.525,19.2)
NetU2_37: U2.37 X1.4 | length 31.5
  Top Layer w0.254: X1.4 13.755,15.525 v1(15.45,15.525) ; v1(25.75,25.1) 25.777,25.127 25.777,26.602 U2.37
  Layer 2 w0.254: v1(15.45,15.525) 13.975,17 13.975,19 15.85,20.875 25.7,20.875 27.3,22.475 27.3,24.275 26.475,25.1 v1(25.75,25.1)
R: R10.1 U2.2 | length 8.2
  Top Layer w0.254: R10.1 11.075,25.65 12.3,24.425 U2.2
RESET: U2.7 X1.1 | length 10.7
  Top Layer w0.254: X1.1 10.323,19.713 11.013,19.713 13.225,21.925 U2.7
  Layer 3 w0.254: X1.1@9.23,18.62 X1.1
pads on no net: ISO1.3 ISO1.14 J1. J2. U1. U2.11 U2.12 U2.13 U2.15 U2.16 U2.17 U2.18 U2.19 U2.20 U2.29 U2.32 U2.38 U2.39 U2.40 U2.41 U2.42 U2.43 U2.45 U2.46 XP1.3

## Polygon pours and split planes (outlines as drawn)
AGND on Bottom Layer "NONET_L-01_P-001" (solid, remove dead copper, pour order 0): 0,57.125 46.4,57.125 46.4,0 0,0
AGND on Layer 3 "NONET_L-01_P-001" (solid, remove dead copper, pour order 1): 0,57.125 46.4,57.125 46.4,0 0,0
AGND on Layer 2 "NONET_L-01_P-001" (solid, remove dead copper, pour order 2): 0,57.125 46.4,57.125 46.4,0 0,0
AGND on Top Layer "NONET_L-01_P-001" (solid, remove dead copper, pour order 3): 0,57.125 46.4,57.125 46.4,0 0,0

## Keep-outs
Keep-Out Layer:
  the board outline again, w0.3

## Silkscreen, mask and mechanical layers (free items; w line width, h text height)
Top Overlay:
  lines w0.2: 20.475,43.65 19.55,43.65 19.55,40.975 20.5,40.975
  text "term" at 18.775,39.55 h1 r90
  text "R" at 11.679,18.404 h1.52
  text "Vout" at 8.221,1.729 h1.52 r90
  text "+5" at 18.921,1.704 h1.52 r90